# Altium PCB TIDA-00643_PCB.PcbDoc (part 3 of 3)
Units mil, origin at the board's own origin, x right, y up, seen from the top; angles counter-clockwise.
Board outline 1000 x 2200 mil, 2 copper layers (Top Layer, Bottom Layer), stack 62 mil thick; 94 components, 77 nets, 320 pads, 233 vias.
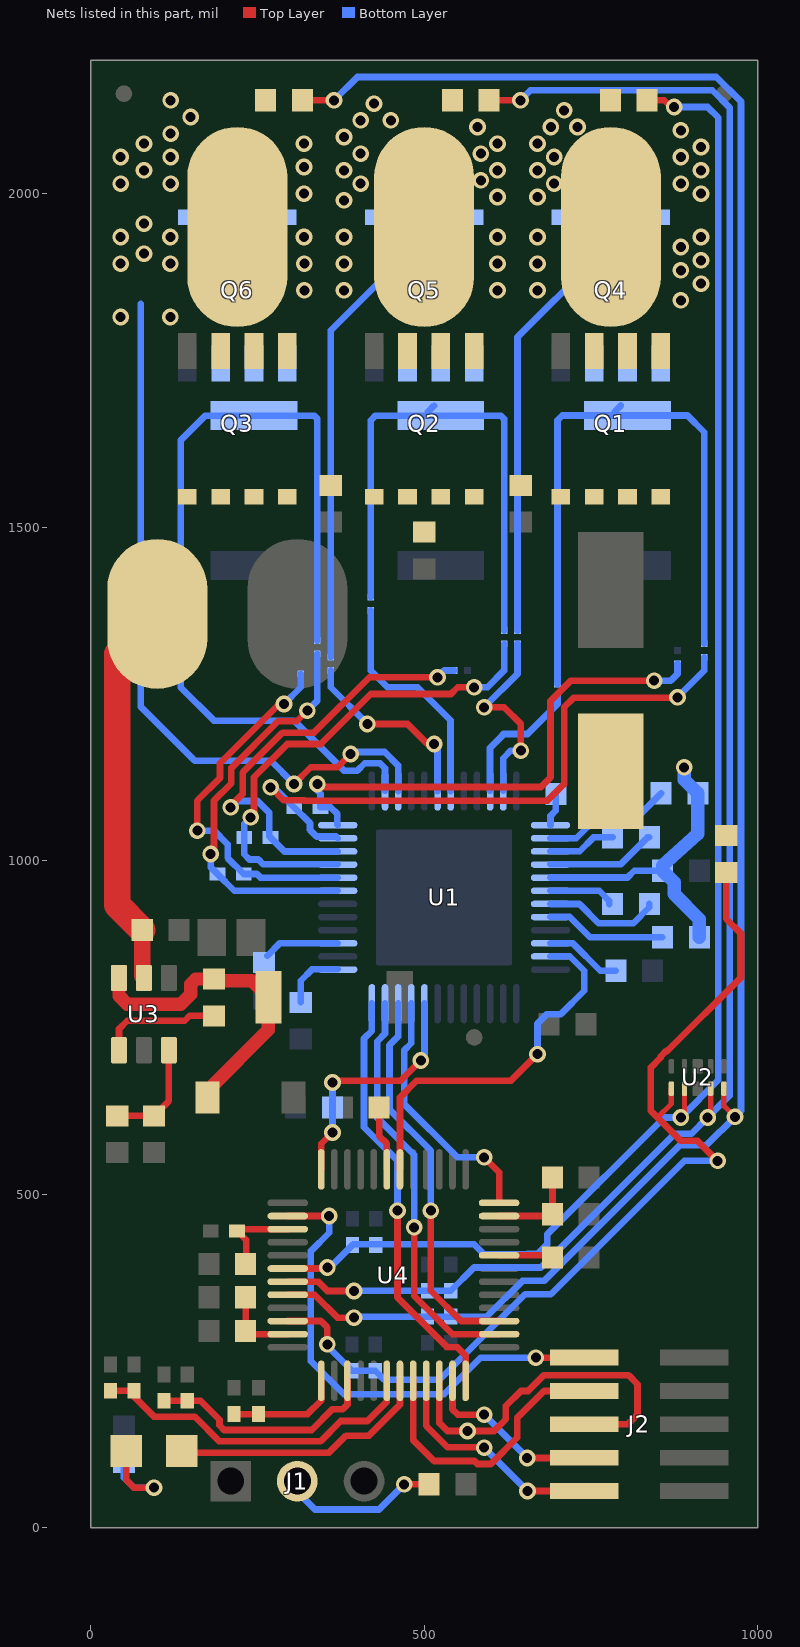
[diagram p2: the nets of this part, all layers, seen from the top]

## Via types
v1: diameter 25, hole 15, Top Layer to Bottom Layer, tented both sides, 208 vias
v2: diameter 25, hole 12, Top Layer to Bottom Layer, tented top, 25 vias

## Nets (pads, with @x,y where several pads share a name; then routed paths per layer and width w, separated by ;. In a path a pad name is that pad's centre, name@x,y a point inside that pad or via, vN(x,y) a via of type N, cw(c..) or ccw(c..) an arc to the next point about the centre after c; other vN are vias at no path point) (continued)
LED: D2.1 U4.19 | length 395.5
  Top Layer w10: D2.1@136.34,115 136.34,112.5 357.5,112.5 383.07,138.07 417.26,138.07 463.84,184.65 U4.19@463.84,220.26
MCU_ISEN_A: C23.1 R17.1 U4.13 | length 168.7
  Top Layer w10: R17.1@215,170.32 C23.1@251.81,170.32 325.32,170.32 345.73,190.73 U4.13@345.73,220.26
MCU_ISEN_B: C24.1 R18.1 U4.15 | length 349.5
  Top Layer w10: R18.1@110,190.32 C24.1@145,190.32 164.68,190.32 193.16,161.84 193.16,153.53 200.19,146.5 331.5,146.5 362.75,177.75 378.14,177.75 385.1,184.71 U4.15@385.1,220.26
MCU_ISEN_C: C25.1 R19.1 U4.18 | length 506.5
  Top Layer w10: C25.1@30,205.32 R19.1@65,205.32 65,196.69 95.19,166.5 156.15,166.5 193.15,129.5 344.5,129.5 375,160 415.15,160 444.16,189.01 U4.18@444.16,220.26
MOT_A: NT1.2 Q1.1 Q1.2 Q1.3 Q4.5 Q4.6 Q4.7 Q4.8 R6.2 TP1.1 | length 670.4
  Top Layer w10: R6.2@780,2147.56 R6.2@782.44,2150
  Bottom Layer w10: NT1.2@640,1345 640,1785 755,1900 Q4.6@755,1964.3
  other v1: 885,1840 670,1855 915,1865 885,1885 670,1895 915,1900 885,1920 670,1935 915,1935 670,1995 915,2000 695,2015 885,2015 670,2035 915,2035 695,2055 885,2055 915,2070 670,2075 885,2095 690,2100 730,2100 710,2125
MOT_B: NT2.2 Q2.1 Q2.2 Q2.3 Q5.5 Q5.6 Q5.7 Q5.8 R7.2 TP2.1 | length 654.6
  Bottom Layer w10: NT2.2@360,1305 360,1795 435,1870 ; 452.91,1877.91 452.91,1883.48 505.91,1883.48
  other v1: 380,1855 610,1855 380,1895 610,1895 380,1935 610,1935 380,1990 610,1995 405,2015 585,2020 380,2035 610,2035 405,2060 585,2060 610,2075 380,2085 580,2100 405,2110 450,2110 425,2135
MOT_C: NT3.2 Q3.1 Q3.2 Q3.3 Q6.5 Q6.6 Q6.7 Q6.8 R8.2 TP3.1 | length 605.3
  Bottom Layer w10: NT3.2@75,1305 75,1835 ; 174.42,1934.42 214.09,1934.42 ; 178.48,1883.48 214.09,1883.48
  other v1: 45,1815 119.61,1815 320.39,1855 45,1895 119.61,1895 320.39,1895 80,1910 45,1935 119.61,1935 320,1935 80,1955 320,2000 45,2015 120,2015 80,2035 320,2040 45,2055 120,2055 80,2075 320,2075 120,2090 150,2115 120,2140
NetC1_2: C1.2 U1.15 | length 113.4
  Bottom Layer w10: C1.2@265,857.56 283.86,876.42 U1.15@370.55,876.42
NetC2_1: C2.1 U1.42 | length 99.1
  Bottom Layer w10: U1.42@689.45,954.84 762.6,954.84 777.44,940 C2.1@777.44,935
NetC2_2: C2.2 U1.43 | length 174.9
  Bottom Layer w10: U1.43@689.45,935.16 732.83,935.16 761.72,906.27 813.73,906.27 837.56,930.09 C2.2@837.56,935
NetC3_2: C3.2 U1.46 | length 115.1
  Bottom Layer w10: U1.46@689.45,876.42 722.66,876.42 764.07,835 C3.2@787.44,835
NetC7_1: C7.1 U1.40 | length 164.9
  Bottom Layer w10: U1.40@689.45,994.53 794.53,994.53 835,1035 C7.1@837.56,1035
NetC7_2: C7.2 U1.39 | length 101.6
  Bottom Layer w10: U1.39@689.45,1014.21 733.25,1014.21 754.04,1035 C7.2@782.44,1035
NetC15_2: C15.2 U1.38 | length 193.8
  Bottom Layer w10: U1.38@689.45,1033.58 728.09,1033.58 758.24,1063.73 818.23,1063.73 C15.2@855.39,1100.89
NetC17_2: C17.2 U1.37 | length 50
  Bottom Layer w10: U1.37@689.45,1053.27 689.45,1067.13 697.44,1075.12 C17.2@697.44,1100
NetC20_1: C20.1 D1.1 L1.1 U3.6 | length 473
  Top Layer w10: D1.1@165,645 D1.1@175.53,645
  Top Layer w20: U3.6@42.6,824.13 42.6,797.4 55,785 135,785 150,800 150,815 157.56,822.56 C20.1@185,822.56 187.56,820 241.57,820 L1.1@266.57,795 266.57,746.57 D1.1@180,660
NetC20_2: C20.2 U3.1 | length 182.4
  Top Layer w10: U3.1@42.6,715.87 42.6,747.6 55,760 141.11,760 148.55,767.44 C20.2@185,767.44
NetD2_2: D2.2 R23.2 | length 163.4
  Top Layer w10: D2.2@53.66,115 53.66,71.34 65,60 v1(95,60)
  Bottom Layer w10: R23.2@50,97.44 50,75 65,60 v1(95,60)
NetJ1_2: J1.2 R12.1 | length 240.1
  Top Layer w10: v1(470,65) R12.1@507.44,65
  Bottom Layer w10: J1.2@310,69.84 310,53.74 336.41,27.33 432.33,27.33 v1(470,65)
NetNT4_2: NT4.2 NT7.2 Q4.1 Q4.2 Q4.3 R3.2 | length 959
  Bottom Layer w10: NT4.2@700,1265 700,1280.24 700,1660.24 707.2,1667.44 894.92,1667.44 920,1642.36 NT7.2@920,1325 ; R3.2@785.8,1673.24 R3.2@795,1682.44
NetNT5_2: NT5.2 NT8.2 Q5.1 Q5.2 Q5.3 R4.2 | length 800.2
  Bottom Layer w10: NT5.2@420,1395 420,1660 427.2,1667.2 R4.2@525,1667.2 614.92,1667.2 620,1662.13 NT8.2@620,1345 ; R4.2@505.8,1673 R4.2@515,1682.2
NetNT6_2: NT6.2 NT9.2 Q6.1 Q6.2 Q6.3 R5.2 | length 779.6
  Bottom Layer w10: NT6.2@135,1405 135,1630 172.2,1667.2 R5.2@245,1667.2 334.92,1667.2 340,1662.13 NT9.2@340,1330
NetR1_1: R1.1 U1.13 | length 95.1
  Bottom Layer w10: R1.1@315,787.56 315,820 332.05,837.05 U1.13@370.55,837.05
NetR2_1: R2.1 U1.44 | length 180.3
  Bottom Layer w10: U1.44@689.45,915.79 718.3,915.79 749.09,885 R2.1@856.95,885
NetR15_1: R15.1 R16.2 U3.3 | length 162.7
  Top Layer w10: R15.1@37.6,620.35 R15.1@40.39,617.56 ; R15.1@40,617.56 R15.1@40.39,617.56 ; R16.2@90,616.41 90,617.56 R15.1@40.39,617.56 ; R16.2@95,617.56 117.4,639.96 U3.3@117.4,715.87
NFAULT: R22.1 U1.8 U4.48 | length 372.6
  Top Layer w10: U4.48@345.73,537.19 345.73,575.73 v1(362.56,592.56) ; v1@360,670 464.69,670 v1(495,700.31)
  Bottom Layer w10: v1(362.56,592.56) R22.1@362.56,630 v1(362.56,667.44) ; v1(495,700.31) 500.47,705.79 U1.8@500.47,785.87
NSCS: U1.9 U4.36 | length 386
  Top Layer w10: v1(590,555.31) 612.46,532.85 U4.36@612.46,486.99
  Bottom Layer w10: U1.9@480.79,785.87 480.79,726.38 470,715.59 470,635.31 549.69,555.63 549.69,555.31 v1(590,555.31)
PVDD: C4.1 C5.1 C6.1 C9.1 C15.1 C18.1 C22.1 Q1.5 Q1.6 Q1.7 Q1.8 Q2.5 Q2.6 Q2.7 Q2.8 Q3.5 Q3.6 Q3.7 Q3.8 R2.2 R13.2 TP4.1 U1.41 U3.5 | length 1055.3
  Top Layer w10: U3.5@77.44,826.69 U3.5@80,824.13
  Top Layer w25: U3.5@77.44,826.69 C22.1@77.44,896.1
  Top Layer w40: C22.1@76.95,896.1 40,933.54 40,1275 40,1310 TP4.1@100,1370
  Bottom Layer w10: U1.41@689.45,974.84 804.84,974.84 815,985 C9.1@847.44,985
  Bottom Layer w20: v1(890,1140) 890,1121.4 C15.1@910.51,1100.89 ; C15.1@910,1097.44 910,1040 857.44,992.44 C9.1@857.44,985 875,967.44 875,950 912.56,912.44 R2.2@912.56,885
SCLK: U1.12 U4.24 | length 642.3
  Top Layer w10: v1(460,475.31) 460,345.31 535,270.31 550,270.31 562.27,258.05 U4.24@562.27,220.26
  Bottom Layer w10: U1.12@421.73,785.87 421.73,745.13 410,733.4 410,600.31 460,550.31 v1(460,475.31)
SDI: U1.10 U4.27 | length 582.8
  Top Layer w10: v1(510,475.31) 510,355.31 555.49,309.83 U4.27@612.46,309.83
  Bottom Layer w10: U1.10@461.1,785.87 461.1,736.42 448.17,723.48 448.17,627.15 510,565.31 v1(510,475.31)
SDO: U1.11 U4.26 | length 617
  Top Layer w10: v1(485,450.31) 485,347.72 542.58,290.14 U4.26@612.46,290.14
  Bottom Layer w10: U1.11@441.42,785.87 441.42,740.77 430,729.36 430,614.07 485,559.07 v1(485,450.31)
SH_A: NT1.1 U1.35 | length 301
  Top Layer w10: v1(590,1230) 620,1230 645,1205 v1(645,1165)
  Bottom Layer w10: v1(590,1230) 640,1280 NT1.1@640,1325 ; U1.35@618.58,1104.76 618.58,1153.58 630,1165 v1(645,1165)
SH_B: NT2.1 U1.30 | length 287.9
  Top Layer w10: v1(415,1205) 475.35,1205 505.35,1175 v1(515,1175)
  Bottom Layer w10: NT2.1@360,1285 360,1260 v1(415,1205) ; v1(515,1175) 520.16,1169.84 U1.30@520.16,1104.45
SH_C: NT3.1 U1.27 | length 554.8
  Top Layer w10: v1(305,1115) 330,1140 370,1140 v1(390,1160)
  Bottom Layer w10: NT3.1@75,1285 75,1230.96 155.96,1150 270,1150 v1(305,1115) ; v1(390,1160) 392.98,1162.98 441.07,1162.98 461.1,1142.94 U1.27@461.1,1104.45
SL_A: NT4.1 U1.34 | length 203.2
  Bottom Layer w10: U1.34@598.9,1104.76 598.9,1168.9 617,1187 617,1187.96 619.04,1190 655,1190 700,1235 NT4.1@700,1245
SL_B: NT5.1 U1.31 | length 346.6
  Bottom Layer w10: NT5.1@420,1375 420,1285 445,1260 490,1260 539.5,1210.5 539.5,1104.79 U1.31@539.84,1104.45
SL_C: NT6.1 U1.26 | length 524.6
  Bottom Layer w10: NT6.1@135,1385 135,1260 185,1210 305,1210 380,1135 400,1135 410.98,1145.98 434.02,1145.98 441.42,1138.58 U1.26@441.42,1104.76
SN1: C13.1 NT7.1 U1.23 | length 963.9
  Top Layer w10: v1(270,1110) 289.57,1090.43 299.78,1090.43 299.85,1090.5 320.15,1090.5 320.65,1090 685,1090 710,1115 710,1230 724.5,1244.5 v1@879.5,1244.5
  Bottom Layer w10: v1(270,1110) 275.32,1110 C13.1@305.32,1080 329.02,1056.29 329.02,1046.26 338.94,1036.35 367.79,1036.35 U1.23@370.55,1033.58 ; v1(880,1245) 920,1285 NT7.1@920,1305
SN2: C14.1 NT8.1 U1.21 | length 749.7
  Top Layer w10: v1(240,1065) 245,1070 245,1125 295,1175 345.96,1175 345.96,1175.96 420,1250 540.35,1250 550.35,1260 v1(575,1260)
  Bottom Layer w10: v1(240,1065) 230.32,1055.32 C14.1@230.32,1035 230.32,1009.68 238.16,1001.84 251.47,1001.84 258.78,994.53 U1.21@370.55,994.53 ; v1(575,1260) 595,1260 620,1285 NT8.1@620,1325
SN3: C16.1 NT9.1 U1.19 | length 600.6
  Top Layer w10: v1@185,1015 185,1090 211,1116 211,1139.08 280.92,1209 309,1209 v1(325,1225)
  Bottom Layer w10: v1(180,1010) 180,990.32 C16.1@190.32,980 215.47,954.84 U1.19@370.55,954.84 ; v1(325,1225) 340,1240 NT9.1@340,1310
SP1: C13.2 NT10.1 U1.24 | length 777.3
  Top Layer w10: v1(340,1115) 344.5,1110.5 675.15,1110.5 689.5,1124.85 689.5,1239.5 720,1270 v1(845,1270)
  Bottom Layer w10: v1(340,1115) 340,1105 344.69,1100.31 C13.2@344.69,1080 360,1080 370,1070 370,1054.13 U1.24@370.55,1053.58 ; v1(845,1270) 870,1270 880,1280 NT10.1@880,1295
SP2: C14.2 NT11.1 U1.22 | length 656.1
  Top Layer w10: v1(210,1080) 210,1082 228,1100 228,1132.04 287.96,1192 335,1192 418,1275 v1(520,1275)
  Bottom Layer w10: v1(210,1080) 219.5,1089.5 250.15,1089.5 268.05,1071.59 268.05,1036.63 C14.2@269.69,1035 290.79,1013.9 U1.22@370.55,1013.9 ; v1(520,1275) 530,1285 NT11.1@545,1285
SP3: C16.2 NT12.1 U1.20 | length 555
  Top Layer w10: v1(160,1045) 160,1090 194,1124 194,1146.12 282.88,1235 v1(290,1235)
  Bottom Layer w10: v1(160,1045) 185,1045 205.39,1024.61 205.39,1004.29 C16.2@229.69,980 249.27,980 254.74,974.53 U1.20@370.55,974.53 ; v1(290,1235) 315,1260 NT12.1@315,1280
TCK: J2.4 U4.23 | length 270.5
  Top Layer w10: U4.23@542.58,220.26 542.58,177.42 550.5,169.5 v1(590,169.5) ; v1(654.5,104.5) 739.5,104.5 J2.4@740,105
  Bottom Layer w10: v1(590,169.5) v1@654.5,105
TDI: J2.8 U4.20 | length 422.9
  Top Layer w10: U4.20@483.53,220.26 483.53,131.47 515,100 575.35,100 579.85,95.5 600.15,95.5 639.5,134.85 639.5,164.5 680,205 J2.8@740,205
TDO: J2.6 U4.22 | length 548.6
  Top Layer w10: U4.22@522.9,220.26 522.9,157.1 535,145 v1(565,145) 605,145 622.5,162.5 622.5,182.5 645,205 655.96,205 679.77,228.81 806.19,228.81 820,215 820,170 805,155 J2.6@740,155
TMS: J2.2 U4.21 | length 344.8
  Top Layer w10: U4.21@503.21,220.26 503.21,152.75 535.46,120.5 589.5,120.5 v1(590,120) ; v1(655,55) J2.2@740,55
  Bottom Layer w10: v1(590,120) v1(655,55)
TRST': J2.10 U4.2 | length 744.6
  Top Layer w10: U4.2@295.54,467.31 v1(357.69,467.31) ; v1(667.5,255) J2.10@740,255
  Bottom Layer w10: v1(357.69,467.31) 357.69,442.31 330.39,415 330.04,415 330.04,249.96 380,200 530,200 585,255 v1(667.5,255)
VDD1: C29.1 U4.32 | length 87.8
  Top Layer w10: U4.32@612.46,408.25 690.69,408.25 C29.1@697.44,415
VDD2: C30.1 U4.43 | length 82.6
  Top Layer w10: C30.1@432.56,615 432.56,587.44 444.16,575.84 U4.43@444.16,537.19
VDDA: C27.1 L3.1 U4.11 | length 117
  Top Layer w10: C27.1@229.76,293.11 232.73,290.14 U4.11@295.54,290.14 ; C27.1@232.56,295.32 L3.1@232.56,345.31
VDDIO: C26.1 L2.1 U4.35 | length 137.3
  Top Layer w10: U4.35@612.46,467.31 C26.1@694.75,467.31 ; C26.1@692.44,470 L2.1@692.44,525
VSEN_A: C10.1 R6.1 R9.2 U2.2 U4.6 | length 2389.3
  Top Layer w8: v1(885,615) 890.31,620.31 U2.2@890.31,658.27
  Top Layer w10: U4.6@295.54,388.57 353.57,388.57 v1(355,390) ; R6.1@834.37,2140 860,2140 870,2130 v1(875,2130)
  Bottom Layer w10: v1(355,390) 358.8,390 R9.2@392.59,423.79 393.8,425 575,425 590,410 655,410 655.5,410.5 670.15,410.5 684.5,424.85 684.5,439.5 860,615 v1(885,615) 941,671 941,2114 925,2130 v1(875,2130)
VSEN_B: C11.1 R7.1 R10.2 U2.4 U4.7 | length 2693.3
  Top Layer w8: v1(925,615) 929.68,619.68 U2.4@929.68,658.27
  Top Layer w10: U4.7@295.54,368.88 341.12,368.88 355,355 v1(395,355) ; R7.1@597.07,2140 v1(644.51,2140)
  Bottom Layer w10: v1@395.31,355.31 C11.1@505,355.31 R10.2@540,355.31 574.68,390 675,390 875.5,590.5 900.5,590.5 v1(925,615) 958,648 958,2129 932,2155 659.51,2155 v1(644.51,2140)
VSEN_C: C12.1 R8.1 R11.2 U2.5 U4.8 | length 3068
  Top Layer w8: U2.5@949.37,658.27 949.37,632.63 v1(966,616)
  Top Layer w10: U4.8@295.54,349.2 335.8,349.2 370,315 v1(395,315) ; R8.1@317.56,2140 v1(365,2140)
  Bottom Layer w10: v1(365,2140) 400,2175 938.04,2175 975,2138.04 975,625 v1@967,617 ; v1@396.5,316.5 R11.2@505,316.5 C12.1@540,316.5 593.95,316.5 647.46,370 680,370 883.5,573.5 923.5,573.5 v1(966,616)
VSEN_PVDD: C19.1 R13.1 R14.2 U2.1 U4.10 | length 1439.4
  Top Layer w8: 850,615 870.63,635.63 U2.1@870.63,658.27
  Top Layer w10: U4.10@295.54,309.83 345.17,309.83 355,300 v1(355,275) ; v1(940,550) 910,580 885,580 850,615 840,625 840,690 854.69,704.69 854.69,706.38 862.88,714.56 864.56,714.56 975,825 975,890.8 953,912.8 R13.1@953,982.44
  Bottom Layer w10: v1(355,275) 355,272.11 C19.1@391.79,235.32 R14.2@426.79,235.31 440.09,222.02 523.52,222.02 651.5,350 690,350 890,550 v1(940,550)
WAKE: U1.47 U4.42 | length 566.7
  Top Layer w10: U4.42@463.84,537.19 463.84,645.12 489.04,670.31 630.31,670.31 v1(670,710)
  Bottom Layer w10: v1(670,710) 670,755.7 684.3,770 705,770 740,805 740,835.03 718.3,856.73 U1.47@689.45,856.73
XRS': C28.1 R20.1 U4.3 | length 129
  Top Layer w10: C28.1@219.68,445 233.46,431.22 233.46,396.22 R20.1@232.56,395.31 ; C28.1@222.31,447.62 U4.3@295.54,447.62
pads on no net: FID1.1 FID2.1 FID3.1 J2.7 J2.9 U2.6 U2.7 U2.9 U2.10 U3.4 U4.1 U4.4 U4.5 U4.9 U4.14 U4.16 U4.17 U4.30 U4.31 U4.46 U4.47

## Polygon pours and split planes (outlines as drawn)
GND on Top Layer (solid, remove dead copper, pour order 58): 5,5 5,2195 995,2195 995,5
PVDD on Top Layer "PVDD" (solid, remove dead copper, pour order 42): 175,1255 0,1255 0,1709.71 175,1709.71
PVDD on Top Layer "PVDD" (solid, remove dead copper, pour order 41): 980,1020 745,1020 745,1710 980,1710
MOT_C on Top Layer "MOT_C" (solid, remove dead copper, pour order 35): 340,1725 0,1725 0,2205 340,2205
MOT_B on Top Layer "MOT_B" (solid, remove dead copper, pour order 34): 630,1725 360,1725 360,2205 630,2205
MOT_A on Top Layer "MOT_A" (solid, remove dead copper, pour order 36): 1000,1725 650,1725 650,2205 1000,2205
PVDD on Top Layer "PVDD" (solid, remove dead copper, pour order 37): 30,1710 30,1475 980,1475 980,1710
GND on Top Layer "GND" (solid, remove dead copper, pour order 49): 120,1460 120,1205 880,1205 880,1460
GND on Bottom Layer (solid, remove dead copper, pour order 56): 5,2195 5,5 995,5 995,2195
NetNT6_2 on Bottom Layer "SENC" (solid, remove dead copper, pour order 40): 345,1780 171.3,1780 171.3,1684 170.3,1683 130,1683 130,1575.58 345,1575.58
GND on Bottom Layer "GND" (solid, remove dead copper, pour order 48): 320,1305 155.67,1305 155.67,1560 320,1560
MOT_C on Bottom Layer "MOT_C" (solid, remove dead copper, pour order 43): 340,1795 0,1795 0,2205 340,2205
GND on Bottom Layer "GND" (solid, remove dead copper, pour order 46): 600,1305 440,1305 440,1560 600,1560
NetNT5_2 on Bottom Layer "SENB" (solid, remove dead copper, pour order 39): 620,1780 451.3,1780 451.3,1684 450.3,1683 420,1683 420,1575.58 620,1575.58
NetNT4_2 on Bottom Layer "SENA" (solid, remove dead copper, pour order 38): 900,1780 731.3,1780 731.3,1684 730.3,1683 700,1683 700,1575.58 900,1575.58
GND on Bottom Layer "GND" (solid, remove dead copper, pour order 47): 900,1305 700,1305 700,1560 900,1560
MOT_B on Bottom Layer "MOT_B" (solid, remove dead copper, pour order 44): 630,1795 360,1795 360,2205 630,2205
MOT_A on Bottom Layer "MOT_A" (solid, remove dead copper, pour order 45): 1000,1795 650,1795 650,2200 1000,2200

## Keep-outs
Keep-Out Layer:
  the board outline again, w10
  text ".Layer_Name" at 577,-1203.49 h60

## Other copper
Top Layer:
  text ".Layer_Name" at 577,-1203.49 h60
Bottom Layer:
  text ".Layer_Name" at 577,-1203.49 h60

## Silkscreen, mask and mechanical layers (free items; w line width, h text height)
Top Overlay:
  text "MOTC" at 100,1800 h30 r90
  text "MOTB" at 365,1800 h30 r90
  text "MOTA" at 655,1800 h30 r90
  text "VBAT" at 45.49,1214.71 h30
  text "GND" at 270,1215 h30
  text "VDD" at 175,110 h30
  text "COM" at 270,110 h30
  text "GND" at 365,110 h29
  text "LED" at 81.13,35.98 h30
  text ".Layer_Name" at 577,-1203.49 h60
Bottom Overlay:
  text ".PCB_Rev" at 905,525 h30
  text ".PRJ_Number" at 905,480 h30
  text ".Layer_Name" at 577,-1203.49 h60
Top Paste:
  text ".Layer_Name" at 577,-1203.49 h60
Bottom Paste:
  text ".Layer_Name" at 577,-1203.49 h60
Top Solder:
  text ".Layer_Name" at 577,-1203.49 h60
  text ".Layer_Name" at 577,-1203.49 h60
Bottom Solder:
  text ".Layer_Name" at 577,-1203.49 h60
Drill Guide:
  text ".Layer_Name" at 577,-1203.49 h60
M1 Board Outline:
  the board outline again, w10
  text ".Layer_Name" at 577,-1203.49 h60
M2 Board Dimensions:
  rectangle: 125,-745 500,-620
  rectangle: 0,-620 125,-495
  lines w7: 0,-620 1000,-620 ; 125,-745 125,-495 ; 250,-745 250,-495 ; 500,-745 500,-495 ; 750,-745 750,-495 ; 0,-745 0,-495 1000,-495 1000,-745 0,-745
  text ".Layer_Name" at 577,-1203.49 h60
M3 3D STEP Top:
  text ".Layer_Name" at 577,-1203.49 h60
M4 3D STEP Bottom:
  text ".Layer_Name" at 577,-1203.49 h60
M5 Assembly Top:
  lines w10: -292,-1275.17 6308,-1275.17 ; -292,-1071.83 6310,-1071.83 ; -292,-868.5 -292,-1478.5 3713,-1478.5 6310,-1478.5 6310,-868.5 -291.5,-868.5 -291.5,-1478.5 1284,-1478.5 ; 2173,-1478.5 2173,-868.5 ; 3440,-1071.83 3440,-868.5 ; 4280,-1071.83 4280,-868.5 ; 4902,-1485 4902,-1282.17
  text "COMPONENTS MARKED 'DNP' SHOULD NOT BE POPULATED." at 1153.5,-663.5 h60
  text "ASSEMBLY VARIANT:" at 1153,-779 h60
  text ".VariantName" at 2189,-779 h60
  text "PCB VIEWED FROM TOP SIDE" at -228.5,-1000.67 h60
  text "BOARD #:" at 2248,-1000.67 h60
  text ".PRJ_Number" at 2793.5,-1000.67 h60
  text "REV:" at 3638,-1000.67 h60
  text ".PCB_Rev" at 3929.5,-1000.67 h60
  text "SVN REV:" at 4476,-1000.67 h60
  text ".VersionControl_RevNumber" at 4982,-1000.67 h60
  text "TID #:" at 2248,-1204 h60
  text ".TID" at 2793.5,-1204 h60
  text "PLOT NAME =" at -228.5,-1409.34 h60
  text ".plot_File_Name" at 577,-1409.34 h60
  text "GENERATED    :" at 2250,-1409.34 h60
  text ".Print_Date" at 3119.5,-1409.34 h60
  text ".Print_Time" at 3848.5,-1409.34 h60
  text "TEXAS INSTRUMENTS" at 5113,-1409.34 h60
M6 Assembly Bottom:
  lines w10: -292.5,-1072.33 6309.5,-1072.33 ; -290.5,-1275.67 6309.5,-1275.67 ; 1115.5,-1485.5 1115.5,-1282.67 ; 1737.5,-1072.33 1737.5,-869 ; 2577.5,-1072.33 2577.5,-869 ; 3844.5,-1479 3844.5,-869 ; 4733.5,-1479 6309,-1479 6309,-869 -292.5,-869 -292.5,-1479 2304.5,-1479 6309.5,-1479 6309.5,-869
  text "COMPONENTS MARKED 'DNP' SHOULD NOT BE POPULATED." at 6102,-663 h60
  text ".VariantName" at 5058,-779 h60
  text "ASSEMBLY VARIANT:" at 6097,-779 h60
  text ".VersionControl_RevNumber" at 1035.5,-1001.17 h60
  text "SVN REV:" at 1541.5,-1001.17 h60
  text ".PCB_Rev" at 2088,-1001.17 h60
  text "REV:" at 2379.5,-1001.17 h60
  text ".PRJ_Number" at 3224,-1001.17 h60
  text "BOARD #:" at 3769.5,-1001.17 h60
  text "PCB VIEWED FROM BOTTOM SIDE" at 6246,-1001.17 h60
  text ".TID" at 3224,-1204.5 h60
  text "TID #:" at 3769.5,-1204.5 h60
  text "TEXAS INSTRUMENTS" at 904.5,-1409.84 h60
  text ".Print_Time" at 2169,-1409.84 h60
  text ".Print_Date" at 2898,-1409.84 h60
  text "GENERATED    :" at 3767.5,-1409.84 h60
  text ".plot_File_Name" at 5440.5,-1409.84 h60
  text "PLOT NAME =" at 6246,-1409.84 h60
M9 Title Sheet:
  drawing of 57 lines, arcs and shapes, not listed
  text "1" at 739.84,7691.5 h70
  text "2" at 3235.5,7691.5 h70
  text "3" at 5724.84,7691.5 h70
  text "4" at 8231.51,7691.5 h70
  text "5" at 10730.5,7691.5 h70
  text "6" at 13235.5,7691.5 h70
  text "A" at -416.5,6548.5 h70
  text "A" at 14383.5,6548.5 h70
  text "B" at -416.5,4168.5 h70
  text "B" at 14383.5,4168.5 h70
  text "C" at -416.5,1793.5 h70
  text "C" at 14383.5,1793.5 h70
  text "PROJECT TITLE:" at 11343.5,-67.5 h45
  text ".PRJ_Title" at 11393.5,-200.83 h70
  text "DESIGNED FOR:" at 11343.5,-368.5 h45
  text ".PRJ_Customer" at 11393.5,-508.5 h70
  text "D" at -416.5,-576.5 h70
  text "D" at 14383.5,-576.5 h70
  text "FILE NAME:" at 11343.5,-668.5 h45
  text ".PCB_File_Name_No_Path" at 11393.5,-788.5 h70
  text "Texas Instruments (TI) and/or its licensors do not warrant the accuracy or completeness of this specification" at 6374,-950.34 h45
  text "ENGINEER:" at 11343.5,-958.5 h45
  text "LAYOUT BY:" at 12848.5,-958.5 h45
  text "or any information contained therein. TI and/or its licensors do not warrant that this design will meet" at 6329.01,-1063 h45
  text ".PRJ_Engineer" at 11393.5,-1113.49 h70
  text ".PCB_Layout" at 12899,-1113.49 h70
  text "the specifications, will be suitable for your application or fit for any particular purpose, or will operate in" at 6329.01,-1175.67 h45
  text ".Layer_Name" at 577,-1203.49 h60
  text "ALTIUM DESIGNER VERSION:" at 12848.5,-1268.5 h45
  text "an implementation. TI and/or its licensors do not warrant that the design is production worthy. You should" at 6329.01,-1288.33 h45
  text "completely validate and test your design implementation to confirm the system functionality for your application." at 6374,-1401 h45
  text ".print_Scale" at 11393.5,-1401.83 h70
  text ".Application_BuildNumber" at 12899,-1401.83 h70
  text "1" at 739.84,-1608.5 h70
  text "2" at 3235.5,-1608.5 h70
  text "3" at 5724.84,-1608.5 h70
  text "4" at 8231.51,-1608.5 h70
  text "5" at 10730.5,-1608.5 h70
  text "6" at 13235.5,-1608.5 h70
M10 Fab Notes:
  drawing of 185 lines, arcs and shapes, not listed
  text "DESIGN INFORMATION" at 12381.02,5565 h60
  text "MIN. TRACK WIDTH:" at 11736.46,5385 h60
  text "8" at 12832.7,5385 h60
  text "MIL" at 12987.46,5385 h60
  text "MIN. CLEARANCE:" at 11736.46,5253 h60
  text "0.2" at 12772.7,5253 h60
  text "mm" at 12987.46,5253 h60
  text "MIN. VIA PAD SIZE:" at 11736.46,5121 h60
  text "24" at 12802.71,5121 h60
  text "MIL" at 12987.46,5121 h60
  text "0.05mm (2MIL)" at 12431.46,4979.29 h60
  text "MINIMUM ANNULAR RING" at 11407.23,4975 h60
  text "EXTERNAL" at 13139.46,4975 h60
  text "PER" at 11607.23,4857 h60
  text "IPC-D-275 CLASS 2 LEVEL C" at 11827.23,4857 h60
  text "MIL, HOLES" at 13315.46,4744.71 h60
  text "+/-" at 12923,4744 h60
  text "+/-" at 13777,4744 h60
  text "REGISTRATION TOLERANCES:" at 11407.23,4739 h60
  text "METAL" at 12607,4739 h60
  text "5" at 13183.2,4739 h60
  text "3" at 14016.2,4739 h60
  text "MIL" at 14132.46,4739 h60
  text "MATERIAL:" at 11332.46,4529.54 h60
  text "FR-4 High Tg" at 12318.9,4389.21 h60
  text "FR-408" at 11753.46,4380.64 h60
  text "X" at 12165.46,4380.64 h60
  text "OTHER" at 13241.46,4380.64 h60
  text "62 MIL (1.6mm) +/-10%" at 12073.56,4217.92 h60
  text "THICKNESS:" at 11407.23,4213.64 h60
  text "X" at 11945.4,4213.64 h60
  text "OTHER" at 13358.46,4213.64 h60
  text "TOLERANCE:" at 11407.23,4055.64 h60
  text "X" at 12246.53,4055.64 h60
  text "ANSI IPC-6012 TYPE 3 CLASS 2" at 12433.48,4055.64 h60
  text "OTHER +/-" at 12433.46,3899.64 h60
  text "BOW & TWIST:" at 11407.23,3742.64 h60
  text "X" at 12246.53,3742.64 h60
  text "ANSI IPC-6012 TYPE 3 CLASS 2" at 12433.48,3742.64 h60
  text "OTHER +/-" at 12433.46,3584.13 h60
  text "DRILLING:" at 11332.46,3445.64 h60
  text "REFERENCE:" at 11407.23,3328.64 h60
  text "X" at 12055.46,3328.64 h60
  text "AS SHOWN" at 12242.46,3328.64 h60
  text "X" at 12956.46,3328.64 h60
  text "NC_DRILL FILES" at 13093.46,3328.64 h60
  text "PTH MIN COPPER THICKNESS:" at 11407.23,3170.64 h60
  text "X" at 12757.46,3170.64 h60
  text "1MIL" at 12894.46,3170.64 h60
  text "OTHER" at 13391.46,3170.64 h60
  text "BOARD FINISH:" at 11332.46,3011.64 h60
  text "SILKSCREEN:" at 11487.68,2893.64 h60
  text "X" at 12436.46,2893.64 h60
  text "TOP" at 12562.46,2893.64 h60
  text "X" at 12946.46,2893.64 h60
  text "BOTTOM" at 13073.46,2893.64 h60
  text "SILKSCREEN COLOR:" at 11487.68,2726.64 h60
  text "X" at 12435.42,2726.64 h60
  text "WHITE" at 12562.46,2726.64 h60
  text "OTHER" at 13073.46,2726.64 h60
  text "SOLDER RESIST COLOR:" at 11487.68,2556.64 h60
  text "X" at 12055.42,2397.44 h60
  text "GREEN" at 12182.46,2397.44 h60
  text "BLUE" at 12773.46,2397.44 h60
  text "OTHER" at 13311.46,2397.44 h60
  text "IMMERSION GOLD (ENIG)" at 12393.46,2208.92 h60
  text "ENEPIG" at 13731,2205.64 h60
  text "SURFACE FINISH:" at 11332.46,2204.64 h60
  text "X" at 12206.51,2204.64 h60
  text "IMM. TIN/SILVER OR EQUIV" at 11662,2047.64 h60
  text "OTHER" at 13093.46,2047.64 h60
  text "ARRAY/PANEL:" at 11332.46,1868.64 h60
  text "CUT AND TRIM PER MECH LAYER 1" at 12393.46,1864.35 h60
  text "N.C. ROUTE" at 12393.46,1712.64 h60
  text "X" at 13072.46,1712.64 h60
  text "V. SCORE" at 13259.46,1712.64 h60
  text "CERTIFICATION:" at 11332.46,1575.64 h60
  text "MATERIALS AND WORKMANSHIP FOR ALL PCBS" at 12057.46,1575.64 h60
  text "TO MEET OR EXCEED THE REQUIREMENTS OF:" at 12057.46,1477.64 h60
  text "X" at 11683.96,1341.13 h60
  text "ANSI IPC-A-600F CLASS ->" at 11822.96,1341.13 h60
  text "X" at 13462.02,1341.13 h60
  text "2" at 13580.96,1341.14 h60
  text "1" at 13265.96,1339.64 h60
  text "3" at 13934.96,1339.64 h60
  text "X" at 11686.02,1181.64 h60
  text "UL 94V-0" at 11822.96,1181.64 h60
  text "X" at 12498.02,1181.64 h60
  text "RoHS" at 12634.96,1181.64 h60
  text "OTHER" at 13279.36,1181.64 h60
  text "PER ORDER" at 13676.42,1181.64 h60
  text "ADDITIONAL REQUIREMENTS:" at 11332.46,1040.64 h60
  text "MICROSECTION:" at 11407.23,925.64 h60
  text "YES" at 12312.96,925.64 h60
  text "REQUIRED" at 13174.46,769.49 h60
  text "BARE BOARD ELEC. TEST:" at 11407.23,766.64 h60
  text "NONE" at 12712.96,766.64 h60
  text "X" at 13047.46,766.64 h60
  text "PER ORDER" at 13766.46,766.64 h60
  text "MANUFACTURER'S UL:" at 11407.23,609.64 h60
  text "RAIL" at 12572.96,605.35 h60
  text "METAL" at 13064.77,605.35 h60
  text "X" at 13440,605 h60
  text "SILK" at 13576.46,605.35 h60
  text ".Layer_Name" at 577,-1203.49 h60
M11 Gerber Information:
  lines w10: -292,-1275.17 6308,-1275.17 ; -292,-1071.83 6310,-1071.83 ; -292,-868.5 -292,-1478.5 3713,-1478.5 6310,-1478.5 6310,-868.5 -291.5,-868.5 -291.5,-1478.5 1284,-1478.5 ; 2173,-1478.5 2173,-868.5 ; 3440,-1071.83 3440,-868.5 ; 4280,-1071.83 4280,-868.5 ; 4902,-1485 4902,-1282.17
  text "ALL ARTWORK VIEWED FROM TOP SIDE" at -228.5,-1000.67 h60
  text "BOARD #:" at 2248,-1000.67 h60
  text ".PRJ_Number" at 2793.5,-1000.67 h60
  text "REV:" at 3638,-1000.67 h60
  text ".PCB_Rev" at 3929.5,-1000.67 h60
  text "SVN REV:" at 4476,-1000.67 h60
  text ".VersionControl_RevNumber" at 4982,-1000.67 h60
  text "LAYER NAME =" at -228.5,-1203.49 h60
  text "TID #:" at 2248,-1204 h60
  text ".TID" at 2793.5,-1204 h60
  text "PLOT NAME =" at -228.5,-1409.34 h60
  text ".plot_File_Name" at 577,-1409.34 h60
  text "GENERATED    :" at 2250,-1409.34 h60
  text ".Print_Date" at 3119.5,-1409.34 h60
  text ".Print_Time" at 3848.5,-1409.34 h60
  text "TEXAS INSTRUMENTS" at 5113,-1409.34 h60
M12 Stackup:
  drawing of 191 lines, arcs and shapes, not listed
  text "Layer" at 9798.08,7462.5 h60
  text "Name" at 10207.99,7462.5 h60
  text "Material" at 11137.73,7462.5 h60
  text "Thickness" at 11997.5,7462.5 h60
  text "Constant" at 12647.34,7462.5 h60
  text "Board Layer Stack" at 13217.2,7462.5 h60
  text "1" at 9798.08,7342.5 h60
  text "Top Overlay" at 10207.99,7342.5 h60
  text "2" at 9798.08,7222.5 h60
  text "Top Solder" at 10207.99,7222.5 h60
  text "Solder Resist" at 11137.73,7222.5 h60
  text "0.40mil" at 11997.5,7222.5 h60
  text "3.5" at 12647.34,7222.5 h60
  text "3" at 9798.08,7102.5 h60
  text "Top Layer" at 10207.99,7102.5 h60
  text "Copper" at 11137.73,7102.5 h60
  text "1.40mil" at 11997.5,7102.5 h60
  text "4" at 9798.08,6982.5 h60
  text "Dielectric1" at 10207.99,6982.5 h60
  text "FR-4" at 11137.73,6982.5 h60
  text "59.20mil" at 11997.5,6982.5 h60
  text "4.8" at 12647.34,6982.5 h60
  text "5" at 9798.08,6862.5 h60
  text "Bottom Layer" at 10207.99,6862.5 h60
  text "Copper" at 11137.73,6862.5 h60
  text "1.40mil" at 11997.5,6862.5 h60
  text "6" at 9798.08,6742.5 h60
  text "Bottom Solder" at 10207.99,6742.5 h60
  text "Solder Resist" at 11137.73,6742.5 h60
  text "0.40mil" at 11997.5,6742.5 h60
  text "3.5" at 12647.34,6742.5 h60
  text "7" at 9798.08,6622.5 h60
  text "Bottom Overlay" at 10207.99,6622.5 h60
  text ".Layer_Name" at 577,-1203.49 h60
M13 Component Bodies Top:
  text ".Layer_Name" at 577,-1203.49 h60
M14 Component Bodies Bottom:
  text ".Layer_Name" at 577,-1203.49 h60
M15 Courtyards Top:
  text ".Layer_Name" at 577,-1203.49 h60
M16 Courtyards Bottom:
  text ".Layer_Name" at 577,-1203.49 h60
Drill Drawing:
  lines w10: 1461.09,487.27 1516.34,487.27 1488.72,432.02 1461.09,487.27 ; 1461.09,556.34 1461.09,570.15 1474.9,583.96 1461.09,597.78 1461.09,611.59 1474.9,611.59 1488.72,597.78 1502.53,611.59 1516.34,611.59 1516.34,597.78 1502.53,583.96 1516.34,570.15 1516.34,556.34 1502.53,556.34 1488.72,570.15 1474.9,556.34 1461.09,556.34 ; 1461.09,708.28 1488.72,680.66 1516.34,708.28 1488.72,735.91 1461.09,708.28
  lines w12: 1411,394.72 3389.02,394.72 ; 1411,767.68 3389.02,767.68 ; 1748.86,270.4 1748.86,892 ; 2080.86,270.4 2080.86,892 ; 2717.43,270.4 2717.43,892 ; 2976.57,270.4 2976.57,892 ; 1411,270.4 3389.02,270.4 3389.02,892 1411,892 1411,270.4
  text "Symbol" at 1485.59,804.98 h72
  text "Quantity" at 1786.16,804.98 h72
  text "Finished Hole Size" at 2118.16,804.98 h72
  text "Plated" at 2754.72,804.98 h72
  text "Hole Type" at 3013.86,804.98 h72
  text "25" at 1786.16,680.66 h60
  text "12.00mil (0.305mm)" at 2118.16,680.66 h60
  text "PTH" at 2754.72,680.66 h60
  text "Round" at 3013.86,680.66 h60
  text "208" at 1786.16,556.34 h60
  text "15.00mil (0.381mm)" at 2118.16,556.34 h60
  text "PTH" at 2754.72,556.34 h60
  text "Round" at 3013.86,556.34 h60
  text "3" at 1786.16,432.02 h60
  text "40.16mil (1.020mm)" at 2118.16,432.02 h60
  text "PTH" at 2754.72,432.02 h60
  text "Round" at 3013.86,432.02 h60
  text "236 Total" at 1786.16,307.7 h60
  text ".Layer_Name" at 577,-1203.49 h60

## Dimensions
0,2200 to 0,0 on M2 Board Dimensions
0,2200 to 1000,0 on M2 Board Dimensions
0,-745 to 1000,-745 on M2 Board Dimensions

## Text inside footprints (layer, text, board x,y; h text height)
Logo2: Bottom Overlay "Pb" at 884.6,666.1 h60
Logo3: Bottom Overlay "For evaluation only;" at 906.39,604.61 h30; Bottom Overlay "not FCC approved for resale." at 905,570 h30